# Altium PCB DEVEFX000001A.PcbDoc (part 2 of 3)
Units mm, origin at the board's own origin, x right, y up, seen from the top; angles counter-clockwise.
Board outline 90 x 103.5 mm, 6 copper layers (Top Layer, IN1, IN2, IN3, IN4, Bottom Layer), stack 1.072 mm thick; 156 components, 261 nets, 794 pads, 332 vias.
Unrouted connection lines stored in the file: 137.
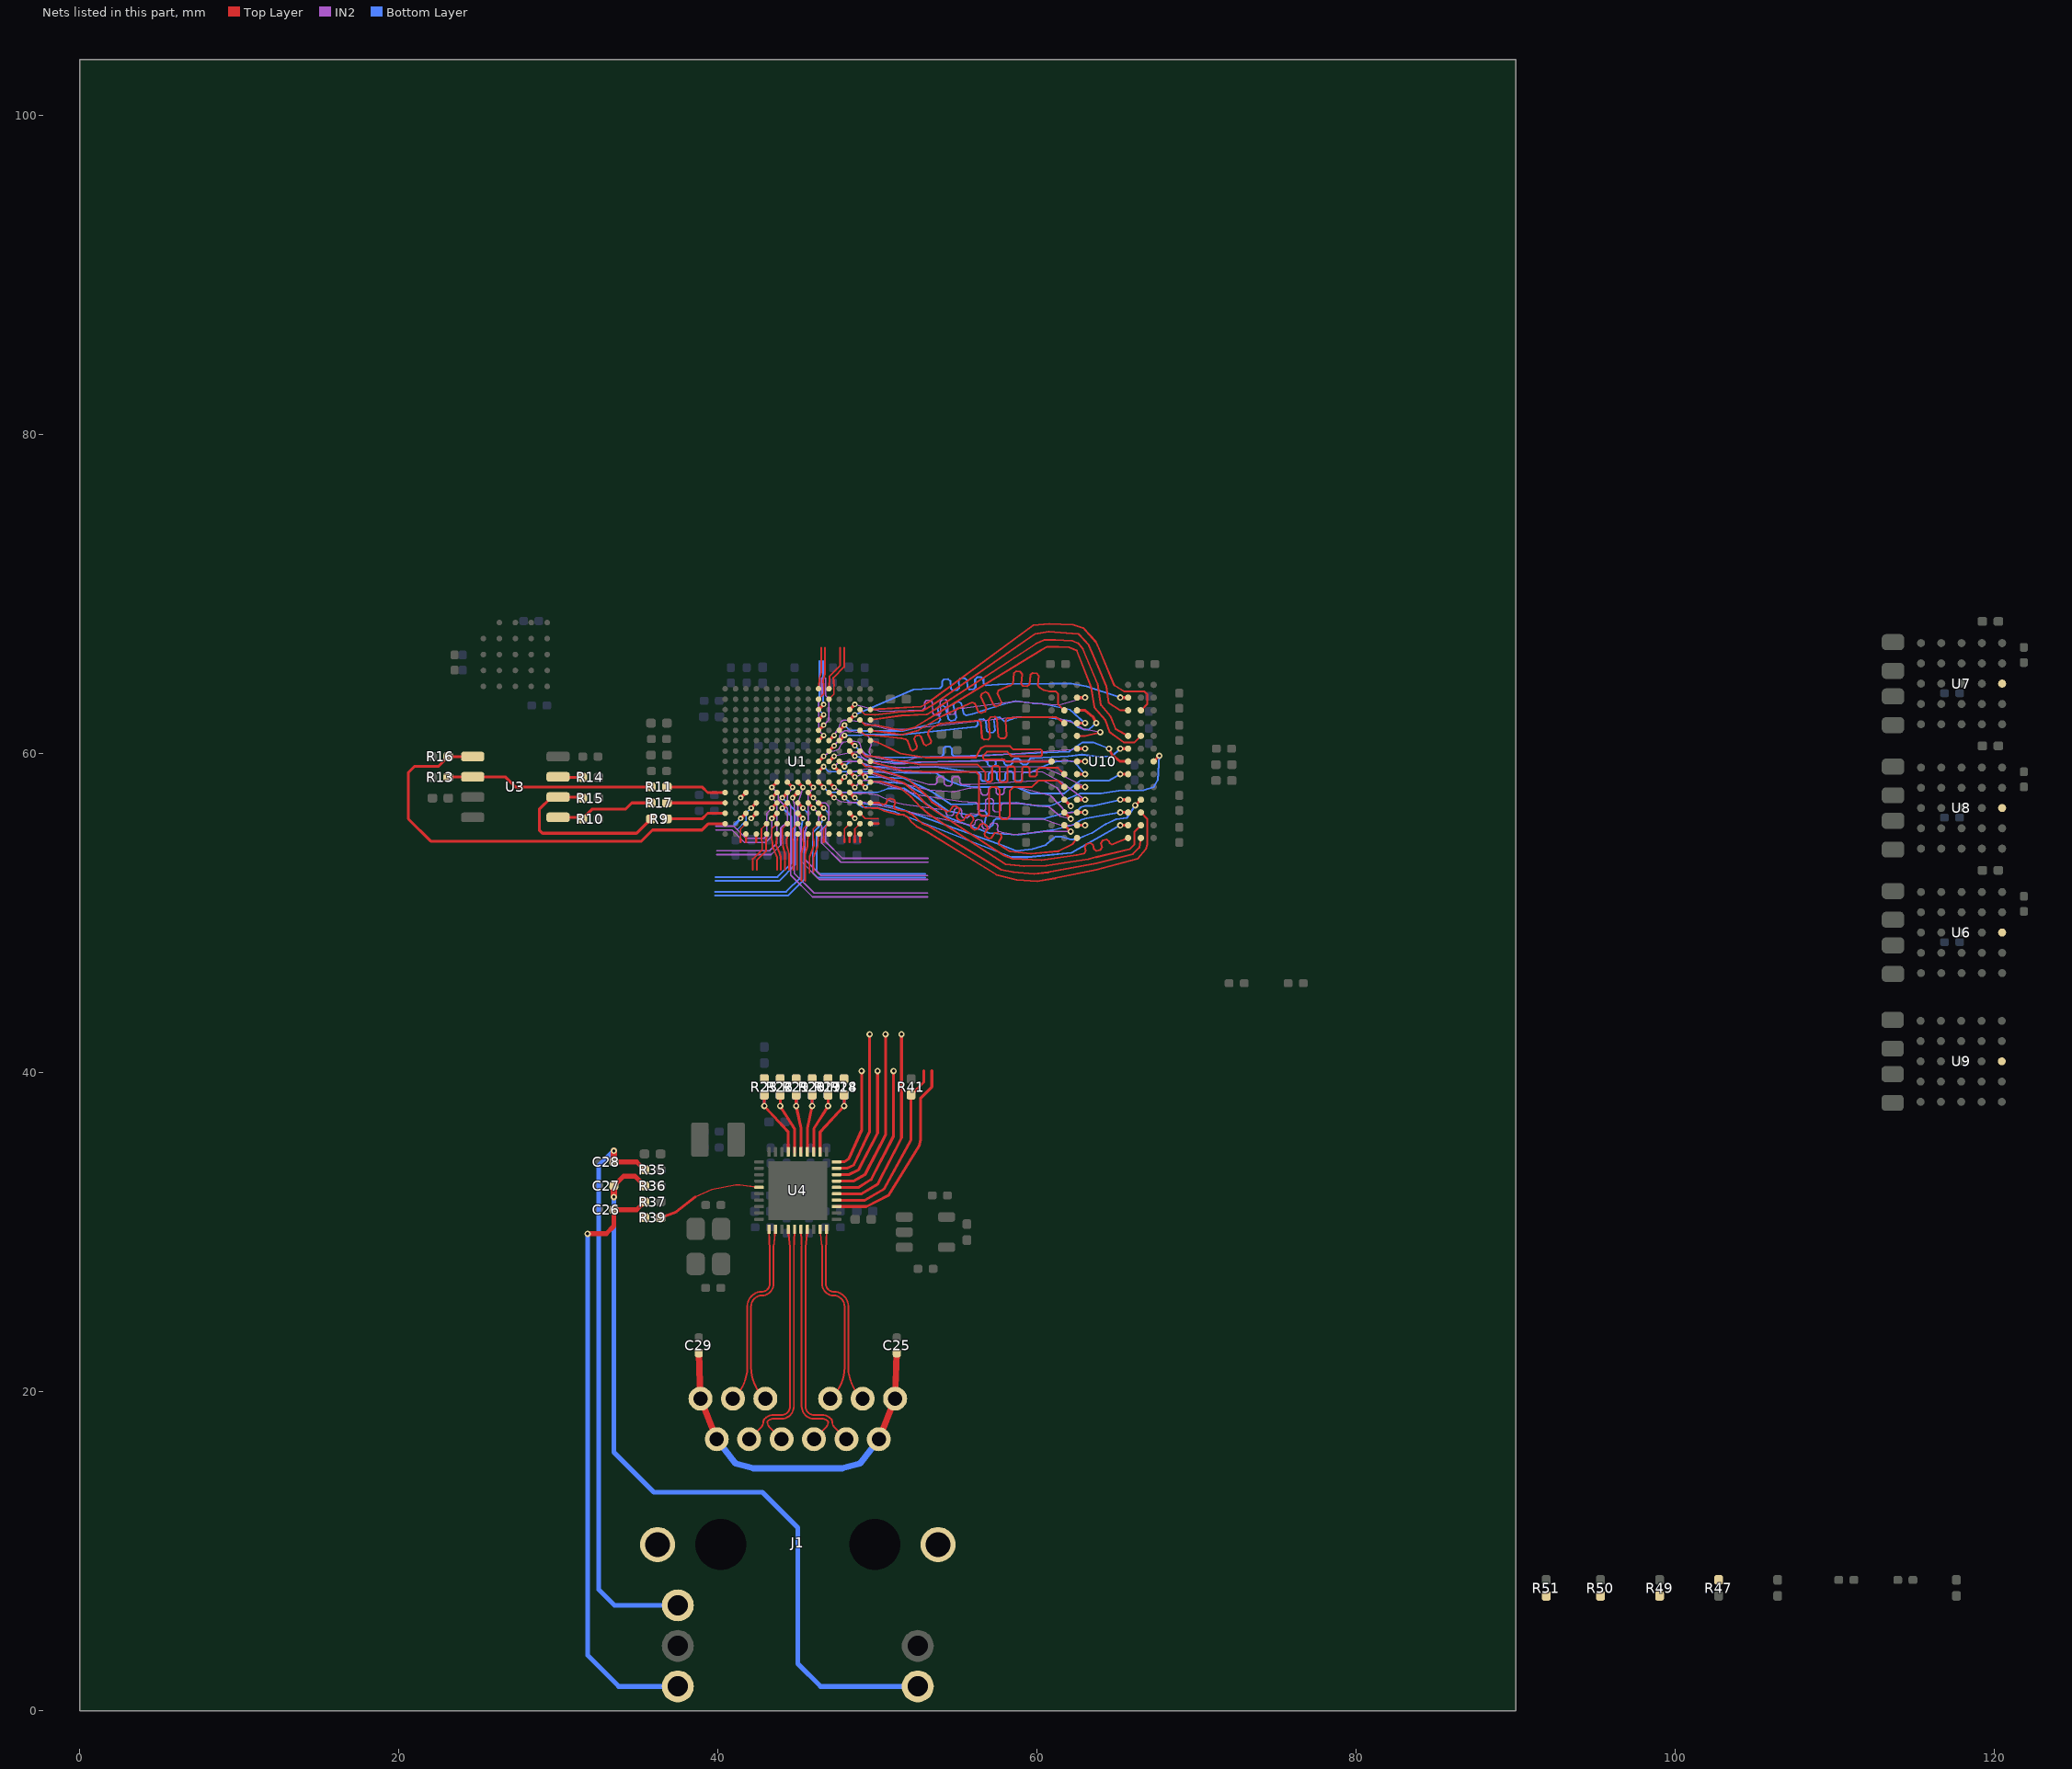
[diagram p6: the nets of this part, all layers, seen from the top]

## Via types
v1: diameter 0.4, hole 0.2, Top Layer to Bottom Layer, tented both sides, 159 vias
v2: diameter 0.35/0.15/0.35 (per signal layer), hole 0.15, Top Layer to Bottom Layer, tented both sides, 91 vias
v3: diameter 0.35, hole 0.15, Top Layer to Bottom Layer, tented both sides, 46 vias
v4: diameter 0.4/0.2/0.4 (per signal layer), hole 0.2, Top Layer to Bottom Layer, tented both sides, 27 vias
v5: diameter 0.5, hole 0.2, Top Layer to Bottom Layer, 9 vias

## Nets (pads, with @x,y where several pads share a name; then routed paths per layer and width w, separated by ;. In a path a pad name is that pad's centre, name@x,y a point inside that pad or via, vN(x,y) a via of type N, cw(c..) or ccw(c..) an arc to the next point about the centre after c; other vN are vias at no path point) (continued)
B2B_DP4_N: U1.D10 | length 4
  Top Layer w0.2: U1.D10@46.3,62.1 v2(46.625,62.425)
  Bottom Layer w0.089: 46.325,63.225 46.325,62.725 v2(46.625,62.425)
  Bottom Layer w0.111: 46.325,63.225 46.356,63.381 46.356,65.8
B2B_DP4_P: U1.C10 | length 3.2
  Top Layer w0.2: U1.C10@46.3,62.75 v2(46.625,63.075)
  Bottom Layer w0.111: 46.594,65.8 46.594,63.381 v2(46.625,63.075)
B2B_DP5_N: U1.B10 | length 3.4
  Top Layer w0.089: U1.B10@46.3,63.4 46.625,63.725 46.625,64.225
  Top Layer w0.111: 46.625,64.225 46.581,64.594 46.7,64.994 46.7,66.625
B2B_DP5_P: U1.A10 | length 2.6
  Top Layer w0.111: U1.A10@46.3,64.05 46.344,64.573 46.344,64.65 46.462,65.092 46.462,66.625
B2B_DP6_N: U1.F10 | length 4.3
  Top Layer w0.2: U1.F10@46.3,60.8 v3(46.625,61.125)
  IN2 w0.089: 46.503,63.628 46.3,63.425 46.3,61.45 v3(46.625,61.125)
  IN2 w0.094: 46.503,63.628 46.503,64.725
B2B_DP6_P: U1.E10 | length 3.6
  Top Layer w0.2: U1.E10@46.3,61.45 v3(46.625,61.775)
  IN2 w0.089: v3(46.625,61.775) 46.95,62.1 46.95,63.425 46.747,63.628
  IN2 w0.094: 46.747,63.628 46.747,64.725
B2B_DP7_N: U1.B11 | length 3.6
  Top Layer w0.089: U1.B11@46.95,63.4 47.275,63.725 47.275,64.225
  Top Layer w0.111: 47.275,64.225 47.231,64.75 47.9,65.419 47.9,66.625
B2B_DP7_P: U1.A11 | length 2.9
  Top Layer w0.111: U1.A11@46.95,64.05 46.994,64.848 47.662,65.517 47.662,66.625
B4A_DP0_N: U1.L8 | length 14.2
  Top Layer w0.2: v3(44.675,57.225) U1.L8@45,57.55
  IN2 w0.094: v3@44.75,57.15 v3(44.675,57.225) 44.775,56.81 44.775,52.5 46.025,51.25 53.15,51.25
B4A_DP0_P: U1.K7 | length 15.3
  Top Layer w0.2: U1.K7@44.35,58.2 v3(44.675,57.875)
  IN2 w0.094: v3(44.675,57.875) 44.35,57.4 44.35,57.075 44.554,56.746 44.554,52.376 45.924,51.006 53.15,51.006
B4A_DP1_N: U1.L9 | length 10.8
  Top Layer w0.2: U1.L9@45.65,57.55 v3(45.975,57.225)
  IN2 w0.089: v3(45.975,57.225) 46.3,56.9 46.725,56.9 46.95,56.675 46.95,55.825
  IN2 w0.094: 46.95,55.825 46.747,55.397 46.747,54.478 47.8,53.425 53.175,53.425
B4A_DP1_P: U1.M9 | length 10
  Top Layer w0.2: U1.M9@45.65,56.9 v3(45.975,56.575)
  IN2 w0.089: v3(45.975,56.575) 46.3,56.25 46.3,55.825
  IN2 w0.094: 46.3,55.825 46.503,55.397 46.503,54.377 47.699,53.181 53.175,53.181
B4A_DP2_N: U1.K9 | length 13.2
  Top Layer w0.2: U1.K9@45.65,58.2 v3(45.975,57.875)
  IN2 w0.089: 45.65,55.667 45.65,57.375 v3(45.975,57.875)
  IN2 w0.094: 45.65,55.667 45.447,55.125 45.447,53.353 46.45,52.35 53.15,52.35
B4A_DP2_P: U1.K8 | length 13.6
  Top Layer w0.2: U1.K8@45,58.2 v3(45.325,57.875)
  IN2 w0.089: 45,55.675 45,56.8 v3(45.325,57.875)
  IN2 w0.094: 45,55.675 45.203,55.125 45.203,53.252 46.349,52.106 53.15,52.106
B4A_DP3_N: U1.P9 | length 3.8
  Top Layer w0.089: 45.325,54.65 45.325,55.275 U1.P9@45.65,55.6
  Top Layer w0.111: 45.229,52 45.229,53.708 cw(c45.348,53.708) 45.233,53.739 45.367,54.232 45.367,54.394 45.325,54.65
B4A_DP3_P: U1.R9 | length 3
  Top Layer w0.111: 45.467,52 45.467,53.692 45.6,54.185 ccw(c45.486,54.216) 45.604,54.216 45.604,54.274 ccw(c44.725,54.332) 45.606,54.332 45.606,54.406 U1.R9@45.65,54.95
B4A_DP4_N: U1.M10 | length 11.8
  Top Layer w0.2: U1.M10@46.3,56.9 v2(46.625,56.575)
  Bottom Layer w0.089: v2(46.625,56.575) 46.95,56.25 46.95,55.625
  Bottom Layer w0.111: 46.95,55.625 46.362,55.112 46.175,54.925 46.175,52.625 46.35,52.45 52.975,52.45
B4A_DP4_P: U1.N10 | length 11.3
  Top Layer w0.2: U1.N10@46.3,56.25 v2(46.625,55.925)
  Bottom Layer w0.111: v2(46.625,55.925) 46.264,55.35 45.937,55.023 45.937,52.527 46.252,52.212 52.975,52.212
B4A_DP5_N: U1.P10 | length 3.3
  Top Layer w0.089: 45.975,54.65 45.975,55.275 U1.P10@46.3,55.6
  Top Layer w0.111: 45.737,52.492 45.737,53.505 cw(c45.856,53.505) 45.746,53.548 46.017,54.239 46.017,54.394 45.975,54.65
B4A_DP5_P: U1.R10 | length 2.4
  Top Layer w0.111: 45.975,52.591 45.975,53.482 46.115,53.839 ccw(c45.046,54.406) 46.215,54.094 46.246,54.173 ccw(c46.136,54.216) 46.254,54.216 46.254,54.339 U1.R10@46.3,54.95
B4A_DP6_N: U1.R11
B4A_DP6_P: U1.R12
B4A_DP7_P: U1.P11 | length 1.3
  Top Layer w0.089: 46.625,54.65 46.625,55.275 U1.P11@46.95,55.6
  Top Layer w0.15: 46.625,54.45 46.625,54.65
B4B_DP0_N: U1.P5 | length 3.3
  Top Layer w0.089: 42.725,54.65 42.725,55.275 U1.P5@43.05,55.6
  Top Layer w0.111: 42.187,52.7 42.187,53.387 42.769,53.969 42.769,54.406 42.725,54.65
B4B_DP0_P: U1.R5 | length 2.5
  Top Layer w0.111: 42.425,52.7 42.425,53.289 43.006,53.87 43.006,54.406 U1.R5@43.05,54.95
B4B_DP1_N: U1.P6 | length 3.1
  Top Layer w0.089: 43.375,54.65 43.375,55.275 U1.P6@43.7,55.6
  Top Layer w0.111: 43.375,54.65 43.417,54.394 43.417,54.216 ccw(c43.536,54.216) 43.425,54.173 43.572,53.799 43.696,53.482 43.696,52.7
B4B_DP1_P: U1.R6 | length 2.3
  Top Layer w0.111: U1.R6@43.7,54.95 43.654,54.403 43.654,54.239 43.786,53.904 43.926,53.548 cw(c43.815,53.505) 43.934,53.505 43.934,52.7
B4B_DP2_N: U1.P7 | length 3.1
  Top Layer w0.089: 44.025,54.65 44.025,55.275 U1.P7@44.35,55.6
  Top Layer w0.111: 44.025,54.65 44.067,54.394 44.067,54.216 ccw(c44.186,54.216) 44.071,54.185 44.204,53.692 44.204,52.7
B4B_DP2_P: U1.R7 | length 2.3
  Top Layer w0.111: U1.R7@44.35,54.95 44.306,54.406 44.306,54.225 44.438,53.739 cw(c44.323,53.708) 44.442,53.708 44.442,52.7
B4B_DP3_N: U1.M6 | length 5.9
  Top Layer w0.2: v3(43.375,56.575) U1.M6@43.7,56.9
  IN2 w0.089: 43.05,55.6 43.05,56.25 v3(43.375,56.575)
  IN2 w0.094: 39.875,55.444 40.981,55.444 41.75,54.675 42.891,54.675 43.091,54.875 43.05,55.225 43.05,55.6
B4B_DP3_P: U1.N6 | length 5.5
  Top Layer w0.2: v3(43.375,55.925) U1.N6@43.7,56.25
  IN2 w0.094: 39.875,55.2 40.881,55.2 41.649,54.431 42.992,54.431 43.334,54.774 43.375,55.225 v3(43.375,55.925)
B4B_DP4_N: U1.K6 | length 8.9
  Top Layer w0.2: v3(43.375,57.875) U1.K6@43.7,58.2
  IN2 w0.08: v3(43.375,57.875) 43.775,57.475 43.775,57.124 44.35,56.549 44.35,55.725 43.934,55.31
  IN2 w0.094: 39.925,53.656 43.326,53.656 43.934,54.264 43.934,55.31
B4B_DP4_P: U1.L6 | length 7.4
  Top Layer w0.2: v3(43.375,57.225) U1.L6@43.7,57.55
  IN2 w0.089: v3(43.375,57.225) 43.7,56.9 43.7,55.25
  IN2 w0.094: 39.925,53.9 43.225,53.9 43.69,54.365 43.69,55.025 43.7,55.25
B4B_DP5_N: U1.L7 | length 10.4
  Top Layer w0.2: v2(44.025,57.225) U1.L7@44.35,57.55
  Bottom Layer w0.111: 39.85,52.012 43.823,52.012 44.838,53.027 44.838,56.412 v2(44.025,57.225)
B4B_DP5_P: U1.M7 | length 9.3
  Top Layer w0.2: v2(44.025,56.575) U1.M7@44.35,56.9
  Bottom Layer w0.111: 39.85,52.25 43.725,52.25 44.6,53.125 44.6,56.025 44.05,56.575 v2(44.025,56.575)
B4B_DP6_N: U1.P8 | length 3
  Top Layer w0.089: 44.675,54.65 44.675,55.275 U1.P8@45,55.6
  Top Layer w0.111: 44.675,54.65 44.719,54.406 44.719,52.7
B4B_DP6_P: U1.R8 | length 2.3
  Top Layer w0.111: 44.956,52.7 44.956,54.406 U1.R8@45,54.95
B4B_DP7_N: U1.M8 | length 11.1
  Top Layer w0.2: U1.M8@45,56.9 v2(45.325,56.575)
  Bottom Layer w0.089: v2(45.325,56.575) 45.65,56.25 45.65,55.625
  Bottom Layer w0.111: 39.825,51.087 44.373,51.087 45.413,52.127 45.413,54.958 45.65,55.625
B4B_DP7_P: U1.N8 | length 9.9
  Top Layer w0.2: U1.N8@45,56.25 v2(45.325,55.925)
  Bottom Layer w0.111: 39.825,51.325 44.275,51.325 45.175,52.225 45.175,55.056 v2(45.325,55.925)
BL_GPIOL_01: U1.R3 | length 0.5
  Top Layer w0.15: 41.75,54.45 U1.R3@41.75,54.95
BL_GPIOL_02: U1.R4 | length 0.5
  Top Layer w0.15: 42.4,54.45 U1.R4@42.4,54.95
BL_TCK: U1.N4 | length 0.5
  Top Layer w0.2: v3(42.075,55.925) U1.N4@42.4,56.25
BL_TDI: U1.P3 | length 1.3
  Top Layer w0.089: 41.425,54.65 41.425,55.275 U1.P3@41.75,55.6
  Top Layer w0.15: 41.425,54.45 41.425,54.65
BL_TDO: U1.M4 | length 2.1
  Top Layer w0.2: v2(42.075,56.575) U1.M4@42.4,56.9
  Bottom Layer w0.09: 41.225,55.25 41.75,55.775 41.75,56.25 v2(42.075,56.575)
BL_TMS: U1.N3 | length 1
  Top Layer w0.2: v2(41.425,55.925) U1.N3@41.75,56.25
  Bottom Layer w0.177: 41.05,55.55 v2(41.425,55.925)
BR_GPIOR_21: U1.N14 | length 1.3
  Top Layer w0.089: U1.N14@48.9,56.25 49.225,55.925 49.85,55.925 50.05,55.925
BR_GPIOR_22: U1.P14 | length 1.3
  Top Layer w0.089: 48.575,54.65 48.575,55.275 U1.P14@48.9,55.6
  Top Layer w0.15: 48.575,54.45 48.575,54.65
BR_GPIOR_24: U1.N13 | length 0.5
  Top Layer w0.2: U1.N13@48.25,56.25 v3(48.575,55.925)
BR_GPIOR_25: U1.P15 | length 0.5
  Top Layer w0.15: U1.P15@49.55,55.6 50.05,55.6
BR_GPIOR_27: U1.P13 | length 1.3
  Top Layer w0.089: 47.925,54.65 47.925,55.275 U1.P13@48.25,55.6
  Top Layer w0.15: 47.925,54.45 47.925,54.65
BR_GPIOR_28: U1.R14 | length 0.5
  Top Layer w0.15: 48.9,54.45 U1.R14@48.9,54.95
BR_GPIOR_29: U1.R13 | length 0.5
  Top Layer w0.15: 48.25,54.45 U1.R13@48.25,54.95
CFG_FLASH_CLK: R9.1 R15.1 U3.6 | length 11.8
  Top Layer w0.177: R15.1@31.5,57.2 31.435,57.265 U3.6@29.975,57.265 29.565,57.265 28.8,56.5 28.8,55.2 29,55 34.9,55 R9.1@35.8,55.9
CFG_FLASH_CLK_R: R9.2 U1.N1 | length 3.8
  Top Layer w0.177: R9.2@36.8,55.9 39,55.9 39.35,56.25 U1.N1@40.45,56.25
CFG_FLASH_CS_N: R16.1 U1.P1 U3.1 | length 28.2
  Top Layer w0.177: U3.1@24.625,59.805 23.105,59.805 R16.1@23.1,59.8 22.5,59.2 21,59.2 20.6,58.8 20.6,55.9 22,54.5 35.2,54.5 35.9,55.2 39,55.2 39.4,55.6 U1.P1@40.45,55.6
CFG_FLASH_MISO: R11.1 R13.1 U3.2 | length 13
  Top Layer w0.177: R13.1@23.1,58.5 23.135,58.535 U3.2@24.625,58.535 26.665,58.535 27.3,57.9 R11.1@35.8,57.9
CFG_FLASH_MISO_R: R11.2 U1.L1 | length 3.8
  Top Layer w0.177: R11.2@36.8,57.9 39,57.9 39.35,57.55 U1.L1@40.45,57.55
CFG_FLASH_MOSI: R10.1 R17.1 U3.5 | length 6.3
  Top Layer w0.177: U3.5@29.975,55.995 31.405,55.995 R10.1@31.5,55.9 32.1,56.5 34.2,56.5 34.6,56.9 R17.1@35.8,56.9
CFG_FLASH_MOSI_R: R17.2 U1.M1 | length 3.6
  Top Layer w0.177: R17.2@36.8,56.9 U1.M1@40.45,56.9
CLK_25M_125M_ETH_CLKOUT: R39.1
CLK_25M_125M_ETH_CLKOUT_R: R39.2 U4.35 | length 6.7
  Top Layer w0.1: 38.575,32.2 39.6,32.675 41.1,32.95 41.375,32.95 41.8,32.9 U4.35@42.575,32.8
  Top Layer w0.177: R39.2@36.4,30.9 37.4,31.275 38.575,32.2
DDR3_A0: U1.J12 U10.K3 | length 17.4
  Top Layer w0.177: U10.K3@62.5,57.1 v1(63,57.1)
  Top Layer w0.2: v3(47.275,59.175) U1.J12@47.6,58.85
  IN2 w0.083: v3(47.275,59.175) 47.6,59.45 48,59.5 48.8,59.5 49.05,59.4 49.725,59.175 51.875,58.825 53.275,58.775 56.25,58.85 60.35,58.825 61.475,58.225 v1(63,57.1)
DDR3_A1: U1.K10 U10.L7 | length 20.6
  Top Layer w0.177: v4(65.2,56.3) U10.L7@65.7,56.3
  Top Layer w0.2: U1.K10@46.3,58.2 v3(46.625,57.875)
  Bottom Layer w0.089: v3(46.625,57.875) 46.95,57.55 49.375,57.55 49.65,57.575 49.999,57.576 50.325,57.675 50.638,57.8
  Bottom Layer w0.118: 50.638,57.8 51.661,57.8 54.1,56.1 57,55 58.8,54.9 61,55.2 62.275,55.525 62.775,55.85 63.1,55.925 63.4,56 v4(65.2,56.3)
DDR3_A2: U1.J13 U10.L3 | length 17.4
  Top Layer w0.177: U10.L3@62.5,56.3 v1(63,56.3)
  Top Layer w0.2: U1.J13@48.25,58.85 v3(48.575,58.525)
  IN2 w0.083: v3(48.575,58.525) 49.125,58.75 49.5,58.75 51.4,58.15 53.225,57.7 54.775,57.6 55.725,57.825 55.818,57.827 55.859,57.828 56.342,57.841 56.466,57.723 56.471,57.51 56.595,57.392 56.836,57.398 56.954,57.522 56.947,57.769 57.065,57.893 57.306,57.899 57.43,57.781 57.436,57.534 57.56,57.416 57.801,57.422 57.919,57.546 57.913,57.759 58.031,57.883 58.604,57.898 58.646,57.899 58.7,57.9 60.822,57.364 61.85,56.3 v1(63,56.3)
DDR3_A3: U1.K12 U10.K2 | length 17.8
  Top Layer w0.169: U10.K2@61.7,57.1 v1(62.1,56.7)
  Top Layer w0.2: U1.K12@47.6,58.2 v3(47.925,58.525)
  IN2 w0.083: v3(47.925,58.525) 48.15,58.8 48.575,58.9 48.825,58.95 49.35,59.025 49.975,58.925 52.625,58.225 53.2,58.05 53.548,58.05 53.589,58.05 53.71,58.171 53.71,58.431 53.83,58.551 54.072,58.551 54.192,58.431 54.192,58.095 54.313,57.975 54.554,57.975 54.675,58.095 54.675,58.431 54.796,58.551 55.037,58.551 55.158,58.431 55.158,58.171 55.278,58.05 55.446,58.05 55.825,58.05 60.35,58.3 61.225,57.85 v1(62.1,56.7)
DDR3_A4: U1.M14 U10.L8 | length 22.2
  Top Layer w0.089: U1.M14@48.9,56.9 49.225,56.575 49.675,56.575
  Top Layer w0.118: 49.675,56.575 50.05,56.575 50.425,56.4 51.275,56.175 51.65,56.15 51.9,56 52.1,55.725 52.45,55.425 53.075,55.1 57.45,52.4 58.725,52.075 60,52 61.125,52.175 63.7,52.7 66.3,53.4 66.8,54 66.9,54.3 66.9,55.9 U10.L8@66.5,56.3
DDR3_A5: U1.K13 U10.L2 | length 17.3
  Top Layer w0.169: U10.L2@61.7,56.3 v1(62.1,55.9)
  Top Layer w0.2: U1.K13@48.25,58.2 v3(48.575,57.875)
  IN2 w0.083: v3(48.575,57.875) 48.9,58.225 49.125,58.3 49.5,58.3 52.775,57.375 55.275,56.975 55.649,56.959 55.69,56.957 56.172,56.937 56.288,56.811 56.275,56.509 56.39,56.383 56.632,56.373 56.757,56.489 56.782,57.06 56.907,57.175 57.148,57.165 57.264,57.039 57.24,56.468 57.355,56.342 57.596,56.332 57.722,56.448 57.735,56.76 57.861,56.875 58.704,56.875 58.975,56.875 60.75,56.65 61.425,56.075 v1(62.1,55.9)
DDR3_A6: U1.K15 U10.M8 | length 19.8
  Top Layer w0.118: U1.K15@49.55,58.2 50.175,58.25 51.45,57.825 52.075,57.3 52.675,56.65 53.175,56.225 56.9,53.775 58.025,53.05 59.175,52.925 60.575,52.975 63.2,53.375 63.7,53.5 65.8,54 66.1,54.3 66.1,55.1 U10.M8@66.5,55.5
DDR3_A7: U1.L11 U10.M2 | length 17.4
  Top Layer w0.169: U10.M2@61.7,55.5 v1(62.1,55.1)
  Top Layer w0.2: U1.L11@46.95,57.55 v3(47.275,57.225)
  IN2 w0.083: v3(47.275,57.225) 47.675,56.975 48.125,56.925 49.225,56.925 55.9,55.475 55.941,55.467 56.084,55.559 56.128,55.763 56.272,55.855 56.508,55.804 56.6,55.66 56.551,55.433 56.643,55.289 56.879,55.238 57.022,55.331 57.072,55.558 57.215,55.65 57.451,55.599 57.544,55.455 57.499,55.252 57.592,55.108 57.73,55.078 57.77,55.069 58.55,54.9 60.4,55.1 v1(62.1,55.1)
DDR3_A8: U1.M15 U10.N8 | length 19.7
  Top Layer w0.118: U1.M15@49.55,56.9 50.1,56.9 50.311,56.815 50.365,56.792 50.534,56.864 50.633,57.109 50.802,57.18 51.042,57.083 51.113,56.914 51.018,56.679 51.089,56.51 51.296,56.461 51.354,56.448 51.45,56.425 51.75,56.4 52.175,56.175 52.525,55.825 52.825,55.6 53.2,55.45 57.75,52.7 58.5,52.575 59.8,52.45 60.7,52.55 63.7,53.1 66,53.7 66.4,54.1 U10.N8@66.5,54.7
DDR3_A9: U1.K11 U10.M3 | length 18.2
  Top Layer w0.177: U10.M3@62.5,55.5 v1(63,55.5)
  Top Layer w0.2: U1.K11@46.95,58.2 v3(47.275,57.875)
  IN2 w0.083: v3(47.275,57.875) 47.775,57.55 48.325,57.5 49.25,57.5 50.025,57.4 50.875,57 51.6,56.8 53.675,56.528 53.716,56.523 54.195,56.46 54.299,56.325 54.289,56.248 54.393,56.113 54.632,56.081 54.768,56.185 54.806,56.481 54.942,56.585 55.181,56.554 55.285,56.419 55.246,56.123 55.35,55.988 55.59,55.956 55.725,56.06 55.735,56.137 55.87,56.241 56.26,56.19 56.301,56.185 58.475,55.9 60.35,55.9 61.45,55.525 v1(63,55.5)
DDR3_A10: U1.J10 U10.H7 | length 20.3
  Top Layer w0.177: v4(65.2,58.7) U10.H7@65.7,58.7
  Top Layer w0.2: U1.J10@46.3,58.85 v3(46.625,59.175)
  Bottom Layer w0.089: v3(46.625,59.175) 46.95,58.85 49.475,58.85
  Bottom Layer w0.118: 49.475,58.85 51.65,58.775 53,58.8 53.6,58.8 54.4,58.3 55.2,58 56,57.9 58.7,57.9 59.6,57.5 61.7,57.5 62.7,58.3 64.5,58.3 v4(65.2,58.7)
DDR3_A11: U1.L12 U10.M7 | length 19.5
  Top Layer w0.177: v4(65.2,55.5) U10.M7@65.7,55.5
  Top Layer w0.2: U1.L12@47.6,57.55 v2(47.925,57.225)
  Bottom Layer w0.094: v2(47.925,57.225) 48.225,56.95 48.5,56.9 48.7,56.877 48.827,56.75 49.025,56.65 49.325,56.625 49.6,56.6 50,56.6
  Bottom Layer w0.118: 50,56.6 50.575,56.45 51.1,56.325 58.4,53.5 59.4,53.5 62.15,53.775 v4(65.2,55.5)
DDR3_A12: U1.K14 U10.K7 | length 19.3
  Top Layer w0.177: v4(65.2,57.1) U10.K7@65.7,57.1
  Top Layer w0.2: U1.K14@48.9,58.2 v2(49.225,57.875)
  Bottom Layer w0.118: v2(49.225,57.875) 49.575,58.225 50.175,58.225 51.65,58.125 53,57.4 54.4,56.4 56.08,56.077 56.138,56.066 56.29,56.168 56.323,56.344 56.475,56.447 56.729,56.398 56.832,56.247 56.709,55.608 56.812,55.456 57.066,55.407 57.218,55.51 57.273,55.797 57.424,55.9 58.164,55.9 60.4,55.9 61.775,56.275 62.425,56.325 62.725,56.625 63,56.7 63.5,56.7 v4(65.2,57.1)
DDR3_A13: U1.H14 U10.N3 | length 19.4
  Top Layer w0.089: U1.H14@48.9,59.5 49.225,59.175 49.65,59.175
  Top Layer w0.118: 49.65,59.175 51.825,58.45 53.05,57.375 53.4,56.95 54.298,56.382 54.348,56.351 54.526,56.391 54.706,56.675 54.884,56.715 55.103,56.576 55.143,56.398 54.951,56.093 54.991,55.915 55.21,55.776 55.388,55.816 55.581,56.121 55.76,56.161 55.978,56.023 56.019,55.844 55.826,55.54 55.866,55.361 56.085,55.223 56.264,55.263 56.456,55.567 56.635,55.607 56.854,55.469 56.894,55.29 56.701,54.986 56.741,54.807 56.96,54.669 57.139,54.709 57.331,55.013 57.51,55.054 57.729,54.915 57.769,54.737 57.589,54.453 57.63,54.274 57.734,54.208 57.784,54.177 58.3,53.85 59.6,53.725 61.325,53.875 62.225,54.325 U10.N3@62.5,54.7
DDR3_A14: U1.J15 U10.N7 | length 19.4
  Top Layer w0.118: U1.J15@49.55,58.85 51.65,58.15 52.475,57.45 52.95,56.9 53.3,56.6 57.925,53.6 58.45,53.4 60.275,53.325 62.475,53.625 62.896,53.719 62.953,53.732 63.051,53.887 62.99,54.16 63.088,54.315 63.34,54.371 63.495,54.273 63.557,53.995 63.712,53.898 63.965,53.954 64.063,54.109 64,54.387 64.098,54.542 64.351,54.598 64.506,54.5 64.53,54.392 64.685,54.294 64.9,54.38 64.956,54.402 U10.N7@65.7,54.7
DDR3_BA0: U1.H15 U10.J2 | length 20.4
  Top Layer w0.118: U1.H15@49.55,59.5 51.525,58.925 53.375,58.85 56.15,58.85 56.35,58.65 56.35,56.25 56.525,56.075 56.875,56.075 56.975,56.175 56.975,57.725 57.15,57.9 57.45,57.9 57.65,57.7 57.65,56.025 57.8,55.875 58.1,55.875 58.275,56.05 58.275,57.65 58.525,57.9 59.675,57.9 60.075,58.3 61.3,58.3 U10.J2@61.7,57.9
DDR3_BA1: U1.L13 U10.K8 | length 20.2
  Top Layer w0.177: v4(66.146,56.746) U10.K8@66.5,57.1
  Top Layer w0.2: U1.L13@48.25,57.55 v2(48.575,57.225)
  Bottom Layer w0.094: v2(48.575,57.225) 48.975,56.875 49.55,56.8 50.225,56.8
  Bottom Layer w0.118: 50.225,56.8 51.075,56.65 57.9,54.2 58.7,53.9 59.7,54 60.55,54.275 60.875,54.55 61.125,54.775 61.55,54.775 62.075,54.6 62.45,54.6 63.45,55.025 64.3,55.575 64.95,55.875 65.625,55.975 v4(66.146,56.746)
DDR3_BA2: U1.H11 U10.J3 | length 17.3
  Top Layer w0.177: U10.J3@62.5,57.9 v1(63,57.9)
  Top Layer w0.2: U1.H11@46.95,59.5 v3(47.275,59.825)
  IN2 w0.083: v3(47.275,59.825) 48.35,60.075 48.675,60.1 48.9,59.95 49,59.775 49.25,59.575 49.675,59.4 50.025,59.325 50.875,59.175 51.375,59.125 51.975,59.15 52.475,59.173 60.375,59.15 61.55,58.625 v1(63,57.9)
DDR3_CAS_N: U1.H10 U10.G3 | length 18.3
  Top Layer w0.177: U10.G3@62.5,59.5 v1(63,59.5)
  Top Layer w0.2: U1.H10@46.3,59.5 v3(46.625,59.825)
  IN2 w0.083: v3(46.625,59.825) 47.05,60.125 47.3,60.15 47.575,60.275 47.65,60.425 47.725,60.6 47.85,60.7 48.2,60.75 48.55,60.75 48.825,60.7 48.9,60.575 49,60.25 49.325,59.775 49.675,59.6 50.05,59.5 51,59.35 51.725,59.35 52.1,59.4 52.5,59.476 60.35,59.575 v1(63,59.5)
DDR3_CK_C: U1.F13 U10.G7 | length 19.4
  Top Layer w0.177: v4(64.5,60.3) 64.7,59.9 65.2,59.5 U10.G7@65.7,59.5
  Top Layer w0.2: U1.F13@48.25,60.8 v2(48.575,60.475)
  Bottom Layer w0.111: v2(48.575,60.475) 48.9,60.15 48.944,60.106
  Bottom Layer w0.118: 48.944,60.106 49.525,59.825 50.1,59.775 51.65,59.75 53.95,59.805 54.009,59.806 54.135,59.939 54.127,60.289 54.253,60.421 54.512,60.427 54.644,60.301 54.653,59.951 54.785,59.825 55.118,59.833 55.177,59.834 55.85,59.85 62.025,60.125 62.85,60.7 63.525,60.7 v4(64.5,60.3)
DDR3_CK_T: U1.G13 U10.F7 | length 19.3
  Top Layer w0.177: v4(65.2,60.3) U10.F7@65.7,60.3
  Top Layer w0.2: U1.G13@48.25,60.15 v2(48.575,59.825)
  Bottom Layer w0.118: v2(48.575,59.825) 49,59.75 49.5,59.5 51.65,59.425 55.875,59.525 56.174,59.54 56.233,59.543 56.75,59.568 56.886,59.445 56.892,59.322 57.028,59.199 57.286,59.211 57.409,59.347 57.402,59.49 57.525,59.625 57.784,59.638 57.919,59.515 57.926,59.373 58.062,59.25 58.321,59.262 58.444,59.398 58.437,59.541 58.56,59.676 58.818,59.689 58.954,59.566 58.961,59.424 59.097,59.301 59.355,59.314 59.478,59.449 59.472,59.573 59.595,59.709 59.76,59.717 59.819,59.72 61.95,59.825 62.8,59.925 63.925,59.8 64.7,59.825 v4(65.2,60.3)
DDR3_CKE: U1.J14 U10.G9 | length 21.7
  Top Layer w0.177: U10.G9@67.3,59.5 v4(67.654,59.854)
  Top Layer w0.2: U1.J14@48.9,58.85 v2(49.225,58.525)
  Bottom Layer w0.118: v2(49.225,58.525) 49.725,58.525 51.65,58.45 53.4,57.6 54.6,56.8 58.7,56.9 60,56.7 60.8,56.7 62.7,57.5 64,57.5 65.1,57.675 66.675,57.7 67.3,57.9 67.55,58.325 v4(67.654,59.854)
DDR3_CS_N: U1.G14 U10.H2 | length 19.2
  Top Layer w0.089: U1.G14@48.9,60.15 49.225,59.825 49.675,59.825
  Top Layer w0.118: 49.675,59.825 50.15,59.775 51.25,59.55 52.65,59.3 56.275,59.3 56.75,58.825 56.75,58.35 56.875,58.225 57.075,58.225 57.175,58.325 57.175,59.125 57.275,59.225 57.55,59.225 57.65,59.125 57.65,58.3 57.75,58.2 58.075,58.2 58.15,58.275 58.15,59.1 58.225,59.175 58.525,59.175 58.6,59.1 58.6,58.275 58.675,58.2 58.975,58.2 59.05,58.275 59.05,59.075 59.125,59.15 59.425,59.15 59.525,59.05 59.525,58.6 59.575,58.55 59.875,58.55 59.975,58.65 59.975,58.942 60.128,59.095 60.875,59.1 61.3,59.1 U10.H2@61.7,58.7
DDR3_DM: U1.D13 U10.B7 | length 21.1
  Top Layer w0.177: v4(65.2,63.5) U10.B7@65.7,63.5
  Top Layer w0.2: U1.D13@48.25,62.1 v2(48.575,62.425)
  Bottom Layer w0.118: v2(48.575,62.425) 52.25,64 53.877,64.097 53.936,64.101 54.057,64.238 54.041,64.507 54.163,64.644 54.421,64.659 54.558,64.538 54.586,64.068 54.723,63.947 54.982,63.962 55.103,64.099 55.075,64.568 55.197,64.705 55.455,64.721 55.592,64.599 55.62,64.13 55.757,64.008 56.016,64.024 56.137,64.161 56.109,64.63 56.231,64.767 56.489,64.783 56.626,64.661 56.642,64.393 56.779,64.271 57.537,64.316 57.596,64.32 58.1,64.35 60.975,64.375 62.15,64.375 63.1,64.2 v4(65.2,63.5)
DDR3_DQ0: U1.C13 U10.B3 | length 18.6
  Top Layer w0.177: U10.B3@62.5,63.5 v1(63,63.5)
  Top Layer w0.2: U1.C13@48.25,62.75 v3(48.575,63.075)
  IN2 w0.083: v3(48.575,63.075) 50.2,62.625 52.8,62.733 52.841,62.735 52.957,62.861 52.943,63.194 53.058,63.32 53.3,63.33 53.425,63.214 53.455,62.512 53.58,62.396 53.822,62.407 53.937,62.532 53.908,63.234 54.024,63.36 54.265,63.37 54.391,63.254 54.42,62.552 54.546,62.437 54.787,62.447 54.902,62.572 54.897,62.7 55.013,62.826 55.409,62.842 55.45,62.844 55.6,62.85 58.65,63.275 60.325,63.1 61.375,63.05 v1(63,63.5)
DDR3_DQ1: U1.C14 U10.C7 | length 21.5
  Top Layer w0.089: U1.C14@48.9,62.75 49.225,62.425 49.85,62.425
  Top Layer w0.118: 49.85,62.425 51.25,62.6 52.825,62.675 53.525,63.075 59.875,67.5 60.725,67.625 62.575,67.5 63.25,66.775 63.825,65.45 64.325,64.2 64.475,63.175 65.2,62.7 U10.C7@65.7,62.7
DDR3_DQ2: U1.E15 U10.C2 | length 20
  Top Layer w0.118: U1.E15@49.55,61.45 51.075,61.25 51.525,61.175 52.55,61.45 54.15,62.4 55.396,62.958 55.45,62.982 55.923,63.194 56.094,63.129 56.335,62.591 56.506,62.525 56.742,62.631 56.807,62.802 56.464,63.569 56.529,63.74 56.766,63.846 56.937,63.781 57.28,63.014 57.451,62.949 57.687,63.055 57.752,63.226 57.512,63.764 57.577,63.935 58.097,64.168 58.151,64.192 58.225,64.225 58.275,64.236 58.336,64.249 58.477,64.365 58.544,65.027 58.685,65.143 58.943,65.117 59.059,64.975 58.998,64.369 59.114,64.228 59.372,64.202 59.514,64.318 59.574,64.924 59.716,65.04 59.973,65.014 60.089,64.872 60.03,64.277 60.146,64.136 60.154,64.13 60.21,64.095 60.4,63.975 60.775,63.9 61.15,63.9 61.3,63.75 61.3,63.1 U10.C2@61.7,62.7
DDR3_DQ3: U1.C15 U10.C8 | length 22.6
  Top Layer w0.118: U1.C15@49.55,62.75 52.725,62.925 53.25,63.25 59.75,68.025 60.75,68.125 62.25,68.075 62.875,67.875 63.675,67 63.8,66.75 64.825,64.275 65.475,63.875 66.725,63.875 66.9,63.7 66.9,63.1 U10.C8@66.5,62.7
DDR3_DQ4: U1.F11 U10.E3 | length 19.5
  Top Layer w0.118: U10.E3@62.5,61.1 63,61.1 v1(63.95,61.325)
  Top Layer w0.2: U1.F11@46.95,60.8 v3(47.275,61.125)
  IN2 w0.083: v3(47.275,61.125) 47.6,61.65 47.625,61.825 47.725,62 47.875,62.075 48.05,62.075 48.85,62 49.25,61.875 50.65,61.5 51.7,61.5 58.7,62.275 60.975,62.325 62.35,61.875 62.875,61.525 v1(63.95,61.325)
DDR3_DQ5: U1.D14 U10.E8 | length 23.2
  Top Layer w0.089: U1.D14@48.9,62.1 49.225,61.775 49.85,61.775
  Top Layer w0.118: 49.85,61.775 51.525,61.425 52.35,61.65 53.975,62.65 60.25,66.475 60.625,66.675 61.325,66.675 62,66.65 62.475,66.45 63.375,64.15 63.575,62.9 64.275,62.075 64.525,61.35 65.425,60.7 66.1,60.7 U10.E8@66.5,61.1
DDR3_DQ6: U1.E14 U10.D2 | length 20.6
  Top Layer w0.089: U1.E14@48.9,61.45 49.225,61.125 49.85,61.125
  Top Layer w0.118: 49.85,61.125 50.457,61.061 51.479,60.952 ; 51.5,60.95 51.479,60.952 ; U10.D2@61.7,61.9 61.175,62.275 59.05,62.275 58.526,62.234 58.468,62.229 58.132,62.203 58.014,62.064 58.089,61.098 57.97,60.958 57.712,60.938 57.573,61.057 57.485,62.181 57.346,62.299 57.088,62.279 56.969,62.14 57.057,61.017 56.938,60.877 56.68,60.857 56.541,60.976 56.465,61.942 56.326,62.061 55.809,62.021 55.751,62.016 54.506,61.919 53.95,61.875 53.45,61.625 53.225,61.425 53.15,61.225 53.35,60.775 53.325,60.625 53.05,60.5 52.9,60.575 52.725,61.05 52.6,61.15 52.375,61.1 52.3,60.925 52.475,60.45 52.425,60.275 52.2,60.175 52.05,60.275 52,60.45 51.9,60.775 51.75,60.9 51.479,60.952
DDR3_DQ7: U1.D15 U10.E7 | length 21.3
  Top Layer w0.118: U1.D15@49.55,62.1 51.475,62.375 53.075,62.437 53.775,62.875 59.925,66.875 60.45,67.125 61.125,67.125 62.2,67.05 62.575,66.9 62.85,66.575 63.775,64.375 64,63.025 64.6,62.325 64.925,61.525 U10.E7@65.7,61.1
DDR3_DQS_C: U1.E12 U10.D3 | length 20.2
  Top Layer w0.177: U10.D3@62.5,61.9 v4(63,61.9)
  Top Layer w0.2: U1.E12@47.6,61.45 v2(47.925,61.775)
  Bottom Layer w0.089: v2(47.925,61.775) 48.25,61.45 48.875,61.45
  Bottom Layer w0.111: 48.875,61.45 49.119,61.406 51.6,61.406 53.775,61.941 53.829,61.954 53.922,62.108 53.758,62.778 53.851,62.932 54.099,62.993 54.254,62.9 54.441,62.137 54.596,62.044 54.844,62.105 54.937,62.259 54.75,63.021 54.843,63.176 55.091,63.237 55.246,63.143 55.41,62.474 55.565,62.38 55.95,62.475 56.337,62.596 56.39,62.613 58.025,63.125 58.65,63.275 59.725,63.15 60.375,63.1 62.05,62.75 v4(63,61.9)
DDR3_DQS_T: U1.F12 U10.C3 | length 20.2
  Top Layer w0.177: U10.C3@62.5,62.7 63,62.7 63.5,62.3 v4(63.7,61.9)
  Top Layer w0.2: U1.F12@47.6,60.8 v2(47.925,61.125)
  Bottom Layer w0.089: v2(47.925,61.125) 48.875,61.125
  Bottom Layer w0.111: 48.875,61.125 49.119,61.169 51.6,61.169 56.125,61.672 56.15,61.675 56.18,61.681 56.293,61.822 56.275,61.985 56.387,62.127 56.641,62.155 56.782,62.042 56.853,61.404 56.994,61.291 57.248,61.32 57.361,61.461 57.29,62.098 57.403,62.24 57.657,62.268 57.798,62.155 57.8,62.132 57.941,62.019 58.1,62.05 58.419,62.152 58.473,62.169 58.725,62.25 60.55,62.275 62.075,62.05 62.525,61.675 62.925,61.5 63.25,61.5 v4(63.7,61.9)
DDR3_ODT: U1.F15 U10.G1 | length 20.3
  Top Layer w0.118: U1.F15@49.55,60.8 50.05,60.675 50.75,60.35 51.425,60 53.025,59.725 56.15,59.725 56.3,60.025 56.5,60.35 56.725,60.45 58.3,60.45 58.5,60.25 60.225,60.25 60.3,60.175 60.3,59.9 60.225,59.825 58.4,59.825 58.125,60.1 56.85,60.1 56.625,59.875 56.625,59.7 56.7,59.625 57.925,59.625 58.075,59.475 60.875,59.475 U10.G1@60.9,59.5 U10.G1@60.798,59.505
DDR3_RAS_N: U1.G11 U10.F3 | length 18.5
  Top Layer w0.177: U10.F3@62.5,60.3 v1(63,60.3)
  Top Layer w0.2: U1.G11@46.95,60.15 v3(47.275,60.475)
  IN2 w0.083: v3(47.275,60.475) 47.575,60.85 47.65,61.1 47.7,61.25 47.8,61.35 47.95,61.425 48.15,61.425 49.1,61.25 49.425,61.075 49.575,60.725 49.6,60.5 49.5,60.3 49.475,60.075 49.575,59.875 49.905,59.728 50.875,59.55 51.45,59.525 51.875,59.55 52.45,59.75 53.325,59.775 56.625,59.85 v1(63,60.3)
DDR3_WE_N: U1.H12 U10.H3 | length 19.3
  Top Layer w0.177: U10.H3@62.5,58.7 v4(63,58.7)
  Top Layer w0.2: U1.H12@47.6,59.5 v2(47.925,59.175)
  Bottom Layer w0.089: v2(47.925,59.175) 48.25,59.5 48.8,59.5
  Bottom Layer w0.118: 48.8,59.5 49.45,59.175 51.65,59.1 53.625,59.15 55.747,58.836 55.806,58.828 55.825,58.825 56.324,58.825 56.453,58.696 56.453,58.397 56.583,58.268 56.842,58.268 56.971,58.397 56.971,58.73 57.101,58.859 57.36,58.859 57.489,58.73 57.489,58.397 57.619,58.268 57.877,58.268 58.007,58.397 58.007,58.73 58.136,58.859 58.395,58.859 58.525,58.73 58.525,58.397 58.654,58.268 58.913,58.268 59.043,58.397 59.043,58.696 59.172,58.825 59.4,58.825 59.6,58.825 60.525,59.25 61.175,59.475 61.875,59.55 62.325,59.475 v4(63,58.7)
ESD_GRD_RING: J1.MH0 J1.MH1
ETH_LED_10_100: C28.2 J1.15 R35.2 | length 36.1
  Top Layer w0.3: C28.2@33.475,34.4 34.9,34.4 R35.2@35.4,33.9
  Top Layer w0.4: C28.2@33.475,34.4 v1(33.475,35.1)
  Bottom Layer w0.3: v1(33.475,35.1) 32.525,34.15 32.525,7.6 33.519,6.606 J1.15@37.482,6.606
ETH_LED_1000: C26.2 J1.17 R37.2 | length 37.9
  Top Layer w0.3: v1(31.825,29.9) 33,29.9 33.475,30.375 C26.2@33.475,31.4 34.9,31.4 R37.2@35.4,31.9
  Bottom Layer w0.3: v1(31.825,29.9) 31.825,3.475 33.774,1.526 J1.17@37.482,1.526
ETH_LED_ACT: C27.2 J1.14 R36.2 | length 49.2
  Top Layer w0.3: C27.2@33.475,32.9 34.075,33.5 34.8,33.5 R36.2@35.4,32.9
  Top Layer w0.4: v1(33.475,32.2) C27.2@33.475,32.9
  Bottom Layer w0.3: v1(33.475,32.2) 33.475,16.2 35.975,13.7 42.775,13.7 45,11.475 45,2.95 46.424,1.526 J1.14@52.518,1.526
ETH_MDI0_N: J1.10 U4.2 | length 11.7
  Top Layer w0.111: J1.10@42.968,19.56 42.815,19.713 cw(c44.611,21.509) 42.071,21.509 42.071,25.346 cw(c42.75,25.346) 42.75,26.025 ccw(c42.75,26.756) 43.482,26.756 43.482,29.107 43.517,29.298 U4.2@43.6,30.175
ETH_MDI0_P: J1.11 U4.1 | length 11.7
  Top Layer w0.111: J1.11@40.936,19.56 41.089,19.713 ccw(c39.293,21.509) 41.833,21.509 41.833,25.346 cw(c42.75,25.346) 42.75,26.263 ccw(c42.75,26.756) 43.244,26.756 43.244,29.107 43.221,29.3 U4.1@43.2,30.175
ETH_MDI1_N: J1.4 U4.5 | length 14.7
  Top Layer w0.111: J1.4@43.984,17.02 43.234,17.77 cw(c43.589,18.125) 43.087,18.125 cw(c43.509,17.703) 43.509,18.3 43.975,18.3 ccw(c43.975,19.081) 44.756,19.081 44.756,29.107 44.779,29.3 U4.5@44.8,30.175
ETH_MDI1_P: J1.5 U4.4 | length 14.7
  Top Layer w0.111: J1.5@41.952,17.02 42.702,17.77 ccw(c42.347,18.125) 42.849,18.125 42.849,18.127 cw(c43.082,18.127) 42.917,18.292 42.92,18.295 cw(c43.507,17.708) 43.507,18.538 43.975,18.538 ccw(c43.975,19.081) 44.518,19.081 44.518,29.107 44.483,29.298 U4.4@44.4,30.175
ETH_MDI2_N: J1.2 U4.7 | length 14.7
  Top Layer w0.111: U4.7@45.6,30.175 45.517,29.298 45.482,29.107 45.482,19.081 ccw(c46.025,19.081) 46.025,18.538 46.493,18.538 cw(c46.493,17.708) 47.08,18.295 47.083,18.292 cw(c46.918,18.127) 47.151,18.127 47.151,18.125 ccw(c47.653,18.125) 47.298,17.77 J1.2@48.048,17.02
ETH_MDI2_P: J1.3 U4.6 | length 14.7
  Top Layer w0.111: U4.6@45.2,30.175 45.221,29.3 45.244,29.107 45.244,19.081 ccw(c46.025,19.081) 46.025,18.3 46.491,18.3 cw(c46.491,17.703) 46.913,18.125 cw(c46.411,18.125) 46.766,17.77 J1.3@46.016,17.02
ETH_MDI3_N: J1.8 U4.10 | length 11.7
  Top Layer w0.111: U4.10@46.8,30.175 46.779,29.3 46.756,29.107 46.756,26.756 ccw(c47.25,26.756) 47.25,26.263 cw(c47.25,25.346) 48.167,25.346 48.167,21.509 ccw(c50.707,21.509) 48.911,19.713 J1.8@49.064,19.56
ETH_MDI3_P: J1.9 U4.9 | length 11.7
  Top Layer w0.111: U4.9@46.4,30.175 46.483,29.298 46.518,29.107 46.518,26.756 ccw(c47.25,26.756) 47.25,26.025 cw(c47.25,25.346) 47.929,25.346 47.929,21.509 cw(c45.389,21.509) 47.185,19.713 J1.9@47.032,19.56
ETH_MDI_TRCT: C25.2 C29.2 J1.1 J1.6 J1.7 J1.12 | length 22.9
  Top Layer w0.4: C29.2@38.8,22.425 J1.12@38.904,19.56 J1.6@39.92,17.02 ; J1.1@50.08,17.02 J1.7@51.096,19.56 C25.2@51.2,22.425
  Bottom Layer w0.4: J1.6@39.92,17.02 41.1,15.5 42.2,15.2 47.8,15.2 48.9,15.5 J1.1@50.08,17.02
ETH_MGMT_MDC: U4.13 | length 12.1
  Top Layer w0.177: U4.13@47.425,31.6 49.3,31.6 50.7,32.3 52.6,35.4 52.7,35.8 52.7,38.4 53.4,39.1 53.4,40.1
ETH_MGMT_MDIO: R41.2 U4.14 | length 11.3
  Top Layer w0.177: U4.14@47.425,32 49.2,32 50.4,32.7 52.1,35.8 R41.2@52.1,38.6 52.9,39.4 52.9,40.1
ETH_RGMII_RXC: R23.1
ETH_RGMII_RXC_R: R23.2 R25.2 U4.27 | length 4.9
  Top Layer w0.177: R23.2@42.9,38.6 v1(42.9,37.9) 44.4,36.275 U4.27@44.4,35.025
  Bottom Layer w0.177: v1(42.9,37.9) R25.2@42.9,38.6
ETH_RGMII_RXCTL: R22.1
ETH_RGMII_RXCTL_R: R22.2 R26.2 U4.26 | length 4.5
  Top Layer w0.177: R22.2@43.9,38.6 v1(43.9,37.9) 44.8,36.475 U4.26@44.8,35.025
  Bottom Layer w0.177: v1(43.9,37.9) R26.2@43.9,38.6
ETH_RGMII_RXD0: R21.1
ETH_RGMII_RXD0_R: R21.2 R29.2 U4.25 | length 4.3
  Top Layer w0.177: R21.2@44.9,38.6 v1(44.9,37.9) 45.2,36.525 U4.25@45.2,35.025
  Bottom Layer w0.177: v1(44.9,37.9) R29.2@44.9,38.6
ETH_RGMII_RXD1: R20.1
ETH_RGMII_RXD1_R: R20.2 R28.2 U4.24 | length 4.3
  Top Layer w0.177: U4.24@45.6,35.025 45.6,36.525 v1(45.9,37.9) R20.2@45.9,38.6
  Bottom Layer w0.177: v1(45.9,37.9) R28.2@45.9,38.6
ETH_RGMII_RXD2: R19.1
ETH_RGMII_RXD2_R: R19.2 R27.2 U4.23 | length 4.5
  Top Layer w0.177: U4.23@46,35.025 46,36.475 v1(46.9,37.9) R19.2@46.9,38.6
  Bottom Layer w0.177: v1(46.9,37.9) R27.2@46.9,38.6
ETH_RGMII_RXD3: R18.1
ETH_RGMII_RXD3_R: R18.2 R24.2 U4.22 | length 4.9
  Top Layer w0.177: U4.22@46.4,35.025 46.4,36.275 v1(47.9,37.9) R18.2@47.9,38.6
  Bottom Layer w0.177: v1(47.9,37.9) R24.2@47.9,38.6
ETH_RGMII_TXC: U4.20 | length 6.5
  Top Layer w0.177: U4.20@47.425,34.4 47.9,34.4 48.2,34.6 49,36.4 v1(49,40.1)
ETH_RGMII_TXCTL: U4.19 | length 9.5
  Top Layer w0.177: U4.19@47.425,34 48.1,34 48.5,34.2 49.5,36.3 v1(49.5,42.4)
ETH_RGMII_TXD0: U4.18 | length 7.9
  Top Layer w0.177: U4.18@47.425,33.6 48.2,33.6 48.8,33.9 50,36.2 v1(50,40.1)
ETH_RGMII_TXD1: U4.17 | length 11
  Top Layer w0.177: U4.17@47.425,33.2 48.5,33.2 49.2,33.6 50.5,36.1 v1(50.5,42.4)
ETH_RGMII_TXD2: U4.16 | length 9.5
  Top Layer w0.177: U4.16@47.425,32.8 48.8,32.8 49.6,33.3 51,36 v1(51,40.1)
ETH_RGMII_TXD3: U4.15 | length 12.5
  Top Layer w0.177: U4.15@47.425,32.4 49,32.4 50,33 51.5,35.9 v1(51.5,42.4)
FM_CFG_FLASH_HOLD_N: R14.1 U3.7 | length 1.5
  Top Layer w0.177: U3.7@29.975,58.535 30.01,58.5 R14.1@31.5,58.5
FM_FPGA_CDONE: U1.L3 | length 0.5
  Top Layer w0.2: v3(41.425,57.225) U1.L3@41.75,57.55
FM_P0V95_EN: R47.1 U7.A3
FM_P1V5_EN: R49.2 U9.A3
FM_P1V8_EN: R50.2 U6.A3
FM_P3V3_EN: R51.2 U8.A3